# Altium PCB Y9A_4.PcbDoc
Units mil, origin at the board's own origin, x right, y up, seen from the top; angles counter-clockwise.
Board outline 6000 x 4000 mil, 2 copper layers (Top Layer, Bottom Layer); 23 components, 15 nets, 71 pads, 0 vias.
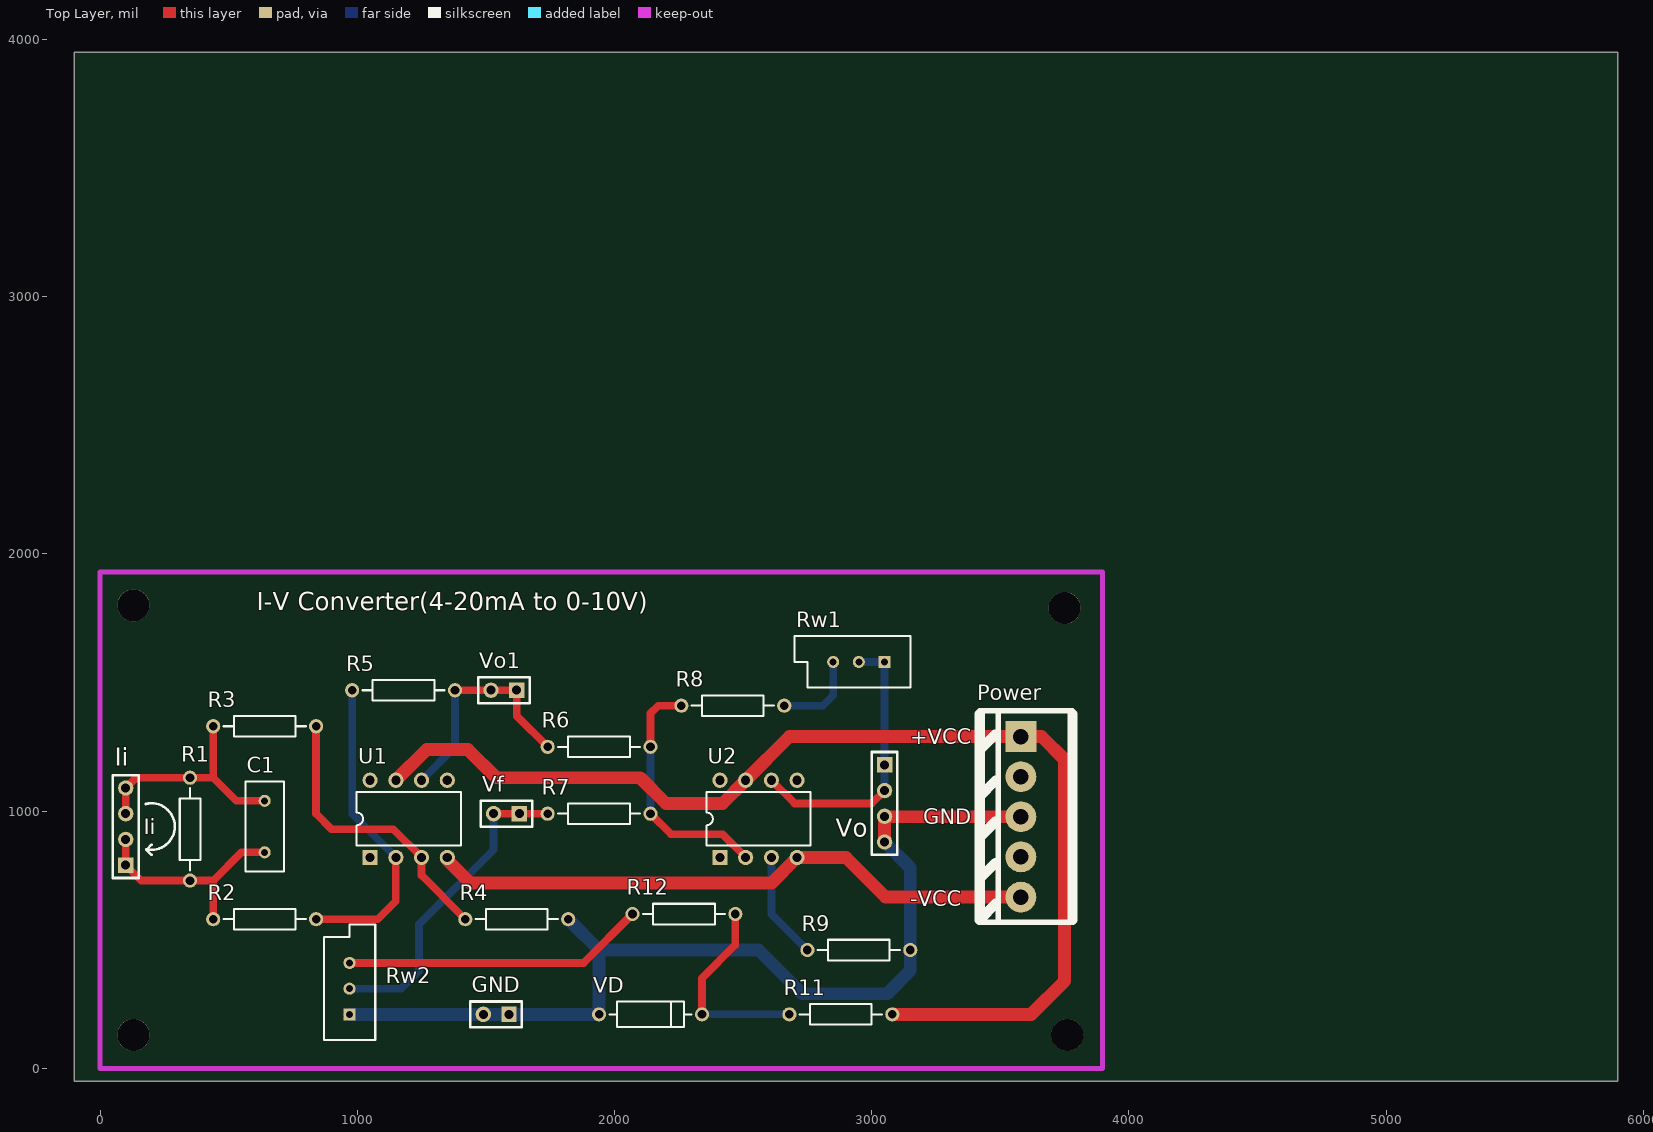
[diagram p0: Top Layer view]
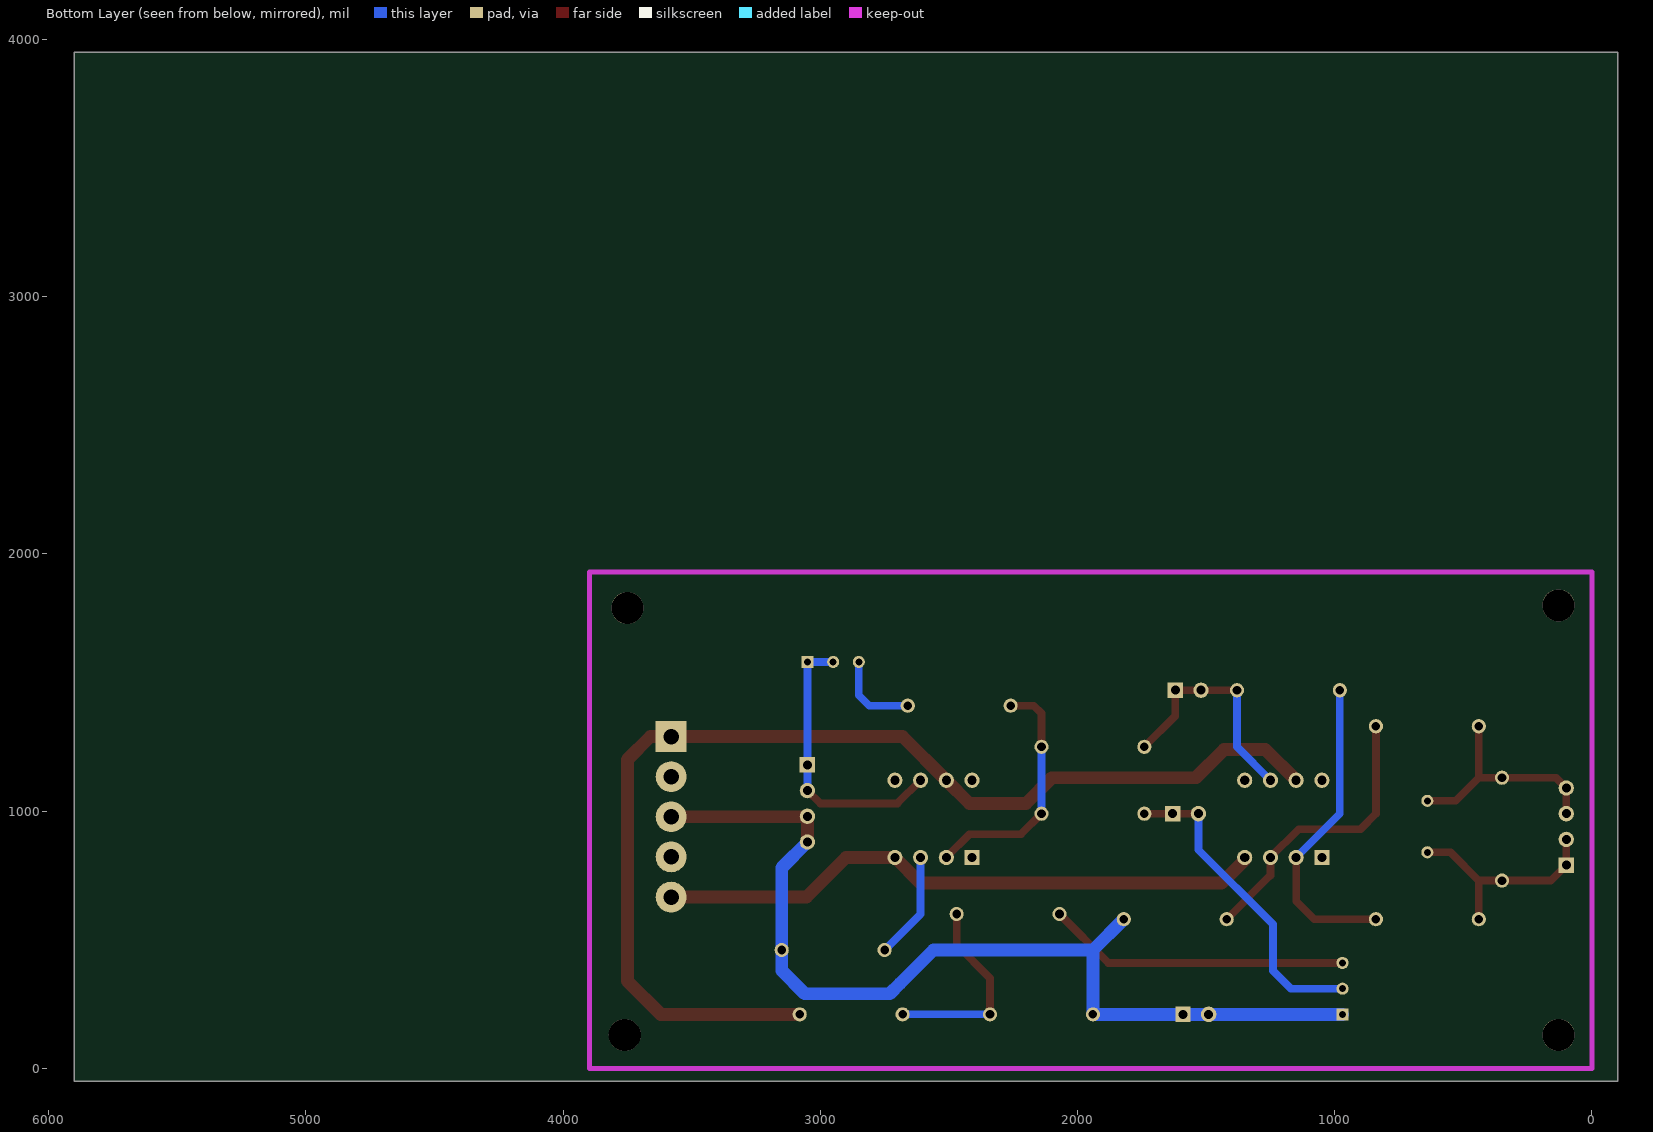
[diagram p1: Bottom Layer view, seen from below]

## Layer stack, top to bottom
Top Layer: signal copper 1.4
Dielectric: dielectric 12.6, FR-4, Dk 4.8
Bottom Layer: signal copper 1.4

## Board outline
-100,-50 5900,-50 5900,3950 -100,3950

## Design rules (kind name [scope] priority, off if disabled: settings)
Clearance [All] p1 off: gap=10
DiffPairsRouting [All] p1 off: maxlimit=10 minlimit=10 mostfreqgap=10 maxuncoupledlength=500
FanoutControl Fanout_BGA [IsBGA] p1 off: bgadir=Out bgaviamode=Centered fanoutstyle=Auto fanoutdirection=Alternating viagrid=1 // Fanout_BGA (Default Rule)
FanoutControl Fanout_LCC [IsLCC] p2 off: bgadir=Out bgaviamode=Centered fanoutstyle=Auto fanoutdirection=Alternating viagrid=1 // Fanout_LCC (Default Rule)
FanoutControl Fanout_SOIC [IsSOIC] p3 off: bgadir=Out bgaviamode=Centered fanoutstyle=Auto fanoutdirection=Alternating viagrid=1 // Fanout_SOIC (Default Rule)
FanoutControl Fanout_Small [(CompPinCount < 5)] p4 off: bgadir=Out bgaviamode=Centered fanoutstyle=Auto fanoutdirection=OutThenIn viagrid=1 // Fanout_Small (Default Rule)
FanoutControl Fanout_Default [All] p5 off: bgadir=Out bgaviamode=Centered fanoutstyle=Auto fanoutdirection=Alternating viagrid=1 // Fanout_Default (Default Rule)
HoleSize [All] p1 off: absolutevalues=TRUE maxlimit=100 minlimit=1 maxpercent=80.000 minpercent=20.000
HoleToHoleClearance [All] p1 off: gap=10 allowstackedmicrovias=TRUE
LayerPairs [All] p1 off: enforce=TRUE
MinimumSolderMaskSliver [All] p1 off: minsoldermaskwidth=10
NetAntennae [All] p1 off: netantennaetolerance=0
PolygonConnect [All] p1: connectstyle=Relief reliefconductorwidth=10 reliefentries=4 polygonreliefangle="90 Angle"
RoutingCorners [All] p1 off: cornerstyle=45-Degree minsetback=100 maxsetback=100
RoutingLayers [All] p1 off: top layer_v5=TRUE bottom layer_v5=TRUE
RoutingPriority [All] p1 off: routingpriority=0
RoutingTopology [All] p1 off: topology=Shortest
RoutingVias [All] p1: holewidth=28 width=50 viastyle="Through Hole" minholewidth=28 minwidth=50 maxholewidth=28 maxwidth=50
ShortCircuit [All] p1 off: allowed=FALSE
SilkToSilkClearance [All] p1 off: silktosilkclearance=10
SilkscreenOverComponentPads [All] p1 off: minsilkscreentomaskgap=10
SolderMaskExpansion [All] p1: expansion=4
TestPointUsage [All] p1 off: valid=0 allowmultiple=FALSE
Testpoint [All] p1 off: side=15 testpointundercomponent=TRUE minsize=40 maxsize=100 preferedsize=60 minholesize=0 maxholesize=40 preferedholesize=32 testpointgrid=1 style=1023 order=0123456789
UnRoutedNet [All] p1 off:
Width Width_3 [InNet('-12V')] p1: maxlimit=50 minlimit=50 preferedwidth=50
Width Width_2 [InNet('GND')] p2: maxlimit=50 minlimit=50 preferedwidth=50
Width Width_1 [InNet('+12V')] p3: maxlimit=50 minlimit=50 preferedwidth=50
Width [All] p4: maxlimit=30 minlimit=30 preferedwidth=30
5 further rules are at their usual default settings.

## Components (designator, comment, footprint, x,y, rotation, side; value= is the part's Value field where it differs from the comment)
C1 "Cap" RAD-0.2 640,940 r270 top
GND "Header 2" SIP-2 1590,210 r180 top
Ii "Header 4" SIP-4 100,790 r90 top
Power "Header 5" "POWER PLUG5" 3580,1290 r90 top
R1 "Res2" AXIAL-0.4 350,930 r270 top
R2 "Res2" AXIAL-0.4 640,580 r180 top
R3 "Res2" AXIAL-0.4 640,1330 r0 top
R4 "Res2" AXIAL-0.4 1620,580 r180 top
R5 "Res2" AXIAL-0.4 1180,1470 r0 top
R6 "Res2" AXIAL-0.4 1940,1250 r0 top
R7 "Res2" AXIAL-0.4 1940,990 r0 top
R8 "Res2" AXIAL-0.4 2460,1410 r0 top
R9 "Res2" AXIAL-0.4 2950,460 r180 top
R11 "Res2" AXIAL-0.4 2880,210 r180 top
R12 "Res2" AXIAL-0.4 2270,600 r180 top
Rw1 "RPot" VR5 2950,1580 r180 top
Rw2 "RPot" VR5 970,310 r90 top
U1 "UA741" DIP-8 1200,970 r0 top
U2 "UA741" DIP-8 2560,970 r0 top
VD "5.1V" DIODE-0.4 2140,210 r0 top
Vf "Header 2" SIP-2 1630,990 r180 top
Vo "Header 4" SIP-4 3050,1180 r270 top
Vo1 "Header 2" SIP-2 1620,1470 r180 top

## Footprints (in the part's own frame and the unit in brackets; to place one, negate y for a bottom-side part, rotate by r counter-clockwise, add the part's x,y. Pads: shape width x height; smd on the part's side, far side on the other; paste and mask are expansions set on the pad)
AXIAL-0.4 [mm] "Resistor; 2 Leads"
  round 1.4 hole 0.85: 1(-5.08,0) 2(5.08,0)
  silkscreen extent -4.06,-1.02 4.06,1.02
DIODE-0.4 [mm] "Tunnel Diode - Dependent Source Model; 2 Leads"
  round 1.4 hole 0.85: 1(-5.08,0) 2(5.08,0)
  silkscreen extent -4.06,-1.27 4.06,1.27
DIP-8 [mm] "DIP; 8 Leads; Row Spacing 7.62 mm; Pitch 2.54 mm"
  rect 1.5x1.5 hole 0.9: 1(-3.81,-3.81)
  round 1.5 hole 0.9: 2(-1.27,-3.81) 3(1.27,-3.81) 4(3.81,-3.81) 5(3.81,3.81) 6(1.27,3.81) 7(-1.27,3.81) 8(-3.81,3.81)
  silkscreen extent -5.15,-2.65 5.15,2.65
"POWER PLUG5" [mil] "双电源插座"
  rect 120x120 hole 60: 1(0,0)
  round 120 hole 60: 2(-156,0) 3(-312,0) 4(-468,0) 5(-624,0)
  silkscreen extent -722,-200 100,160
RAD-0.2 [mm] "Jumper Wire; 2 Leads"
  round 1.2 hole 0.7: 1(-2.54,0) 2(2.54,0)
  silkscreen extent -4.44,-1.91 4.44,1.91
SIP-2 [mil]
  rect 60x60 hole 35: 1(0,0)
  round 60 hole 35: 2(100,0)
  silkscreen extent -50,-50 150,50
SIP-4 [mil]
  rect 60x60 hole 35: 1(0,0)
  round 60 hole 35: 2(100,0) 3(200,0) 4(300,0)
  silkscreen extent -50,-50 350,50
VR5 [mm] "Potentiometer; 3 Leads"
  rect 1.2x1.2 hole 0.7: 1(-2.54,0)
  round 1.2 hole 0.7: 2(0,0) 3(2.54,0)
  silkscreen extent -5.08,-2.54 6.35,2.54

## Part data
C1: "Capacitor"
GND Vf Vo1: "Header, 2-Pin"
Ii Vo: "Header, 4-Pin"
Power: "Header, 5-Pin"
R1 R2 R3 R4 R5 R6 R7 R8 R9 R11 R12: "Resistor"
Rw1 Rw2: "Potentiometer"
VD: library part "D Schottky", "Schottky Diode"

## Free pads (board coordinates)
  round 125 hole 125: 0(3750,1790) 1(3760,130) 2(130,130) 3(130,1800)

## Nets (pads, with @x,y where several pads share a name; then routed paths per layer and width w, separated by ;. In a path a pad name is that pad's centre, name@x,y a point inside that pad or via, vN(x,y) a via of type N, cw(c..) or ccw(c..) an arc to the next point about the centre after c; other vN are vias at no path point)
+12V: Power.1 R11.1 U1.7 U2.7 | length 4465.5
  Top Layer w50: U1.7 1270,1240 1430,1240 1540,1130 2100,1130 2200,1030 2420,1030 U2.7 2680,1290 Power.1 3660,1290 3750,1200 3750,340 3620,210 R11.1
-12V: Power.5 U1.4 U2.4 | length 2382.5
  Top Layer w50: U1.4 1350,810 1440,720 2610,720 U2.4 2900,820 3054,666 Power.5
GND: GND.1 GND.2 Power.3 R4.1 R9.1 Rw2.1 VD.1 Vo.3 Vo.4 | length 3882.5
  Top Layer w50: Vo.4 Vo.3 ; Power.3 Vo.3@3052,978 ; Vo.3 Vo.3@3052,978 ; Vo.3 Vo.3@3052,978
  Bottom Layer w50: Rw2.1 GND.2 GND.1 VD.1 1940,460 ; R4.1 1940,460 ; Vo.4 3150,780 R9.1 3150,380 3060,290 2730,290 2690,330 2560,460 1940,460
NetC1_1: C1.1 Ii.3 Ii.4 R1.1 R3.1 | length 893.8
  Top Layer w30: Ii.3 Ii.4 140,1130 R1.1 440,1130 ; R3.1 440,1130 ; C1.1 530,1040 440,1130
NetC1_2: C1.2 Ii.1 Ii.2 R1.2 R2.2 | length 860.4
  Top Layer w30: Ii.2 Ii.1 160,730 R1.2 440,730 ; R2.2 440,730 ; C1.2 550,840 440,730
NetR2_1: R2.1 R5.1 U1.2 | length 1229.4
  Top Layer w30: R2.1 1080,580 1150,650 U1.2
  Bottom Layer w30: R5.1 980,990 U1.2
NetR3_2: R3.2 R4.2 U1.3 | length 1130.8
  Top Layer w30: R3.2 840,990 900,930 1140,930 U1.3 1250,750 R4.2
NetR5_2: R5.2 R6.1 U1.6 Vo1.1 Vo1.2 | length 913.6
  Top Layer w30: R5.2 Vo1.2 Vo1.1 1620,1370 R6.1
  Bottom Layer w30: U1.6 1380,1250 R5.2
NetR6_2: R6.2 R7.2 R8.1 U2.2 | length 962.8
  Top Layer w30: R7.2 2220,910 2420,910 U2.2 ; R6.2 2140,1380 2170,1410 R8.1
  Bottom Layer w30: R7.2 R6.2
NetR7_1: R7.1 Rw2.2 Vf.1 Vf.2 | length 1239.1
  Top Layer w30: Vf.2 Vf.1 R7.1
  Bottom Layer w30: Rw2.2 1170,310 1240,380 1240,560 1530,850 Vf.2
NetR8_2: R8.2 Rw1.3 | length 336.6
  Bottom Layer w30: R8.2 2810,1410 2850,1450 Rw1.3
NetR9_2: R9.2 U2.3 | length 418
  Bottom Layer w30: U2.3 2610,600 R9.2
NetR11_2: R11.2 R12.1 VD.2 | length 783.8
  Top Layer w30: VD.2 2340,350 2470,480 R12.1
  Bottom Layer w30: VD.2 R11.2
NetR12_2: R12.2 Rw2.3 | length 1178.7
  Top Layer w30: Rw2.3 1880,410 R12.2
NetRw1_1: Rw1.1 Rw1.2 U2.6 Vo.1 Vo.2 | length 1098
  Top Layer w30: U2.6 2700,1030 3000,1030 Vo.2
  Bottom Layer w30: Rw1.2 Rw1.1 Vo.1 Vo.2
pads on no net: Power.2 Power.4 U1.1 U1.5 U1.8 U2.1 U2.5 U2.8

## Keep-outs
Keep-Out Layer:
  lines w20: 0,1929.13 3897.64,1929.13 3897.64,0 0,0 0,1929.13 ; 0,1929.13 0,1929.13

## Silkscreen, mask and mechanical layers (free items; w line width, h text height)
Top Overlay:
  lines w10: 178.04,1027.85 cw(c200,940) 180.36,851.6 ; 200,830 180.36,849.64 180.36,851.6 ; 200,870 181.6,851.6 180.36,851.6
  text "I-V Converter(4-20mA to 0-10V)" at 610,1780 h70
  text "+VCC" at 3150,1260 h60
  text "GND" at 3200,950 h60
  text "Ii" at 170,910 h60
  text "-VCC" at 3150,630 h60